# Altium PCB INPUT_Module.PcbDoc
Units mm, origin at the board's own origin, x right, y up, seen from the top; angles counter-clockwise.
Board outline 45 x 90 mm, 2 copper layers (Top Layer, Bottom Layer); 44 components, 42 nets, 156 pads, 28 vias.
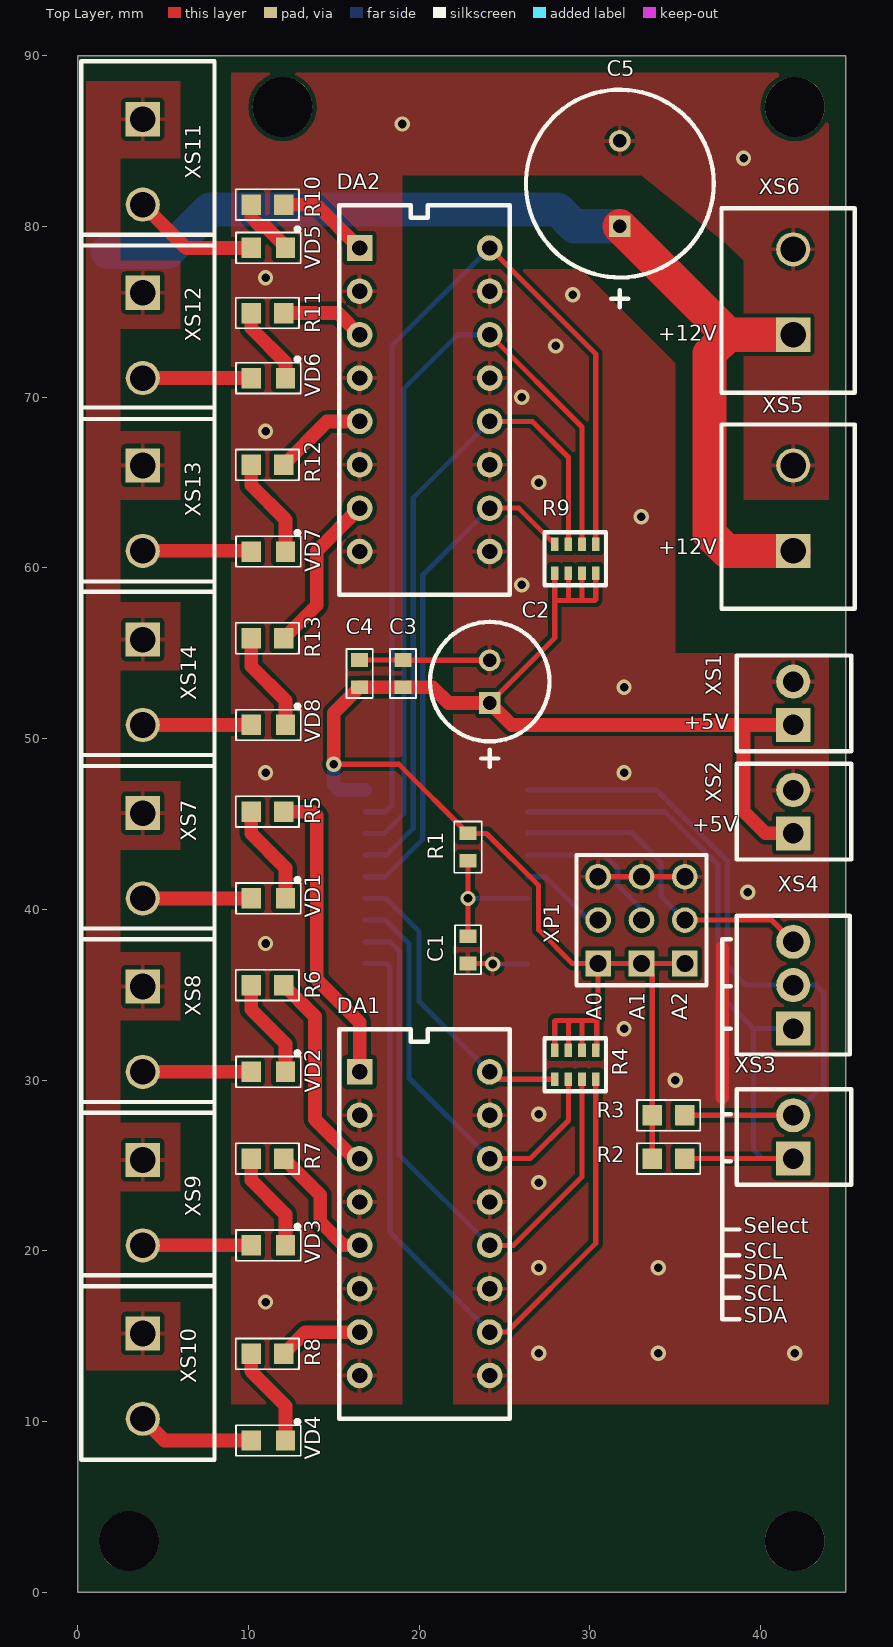
[diagram p0: Top Layer view]
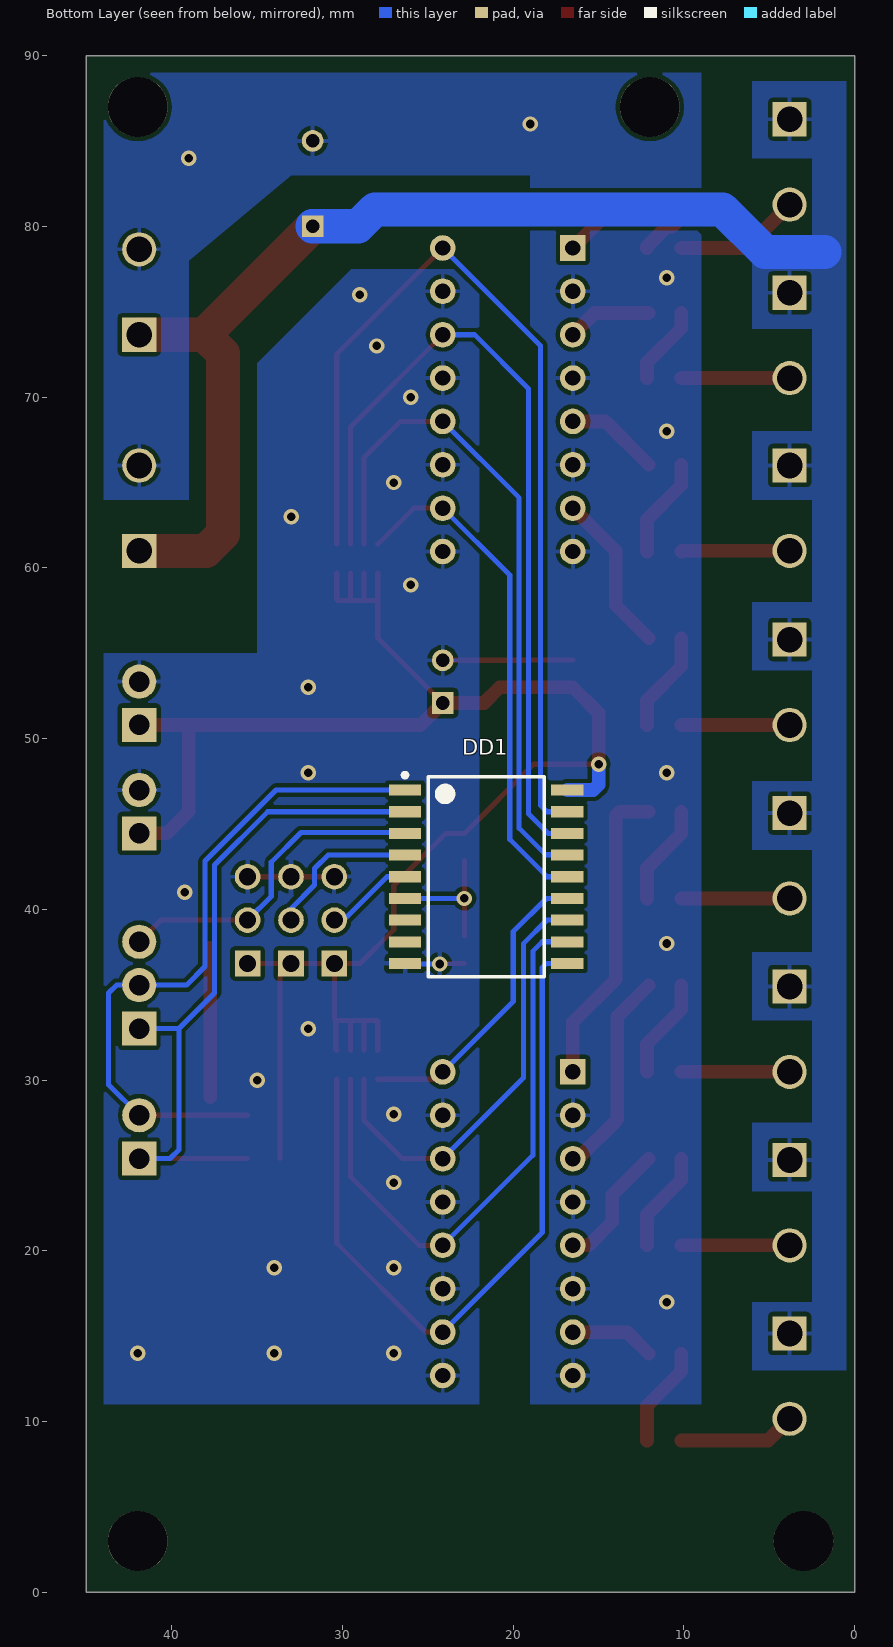
[diagram p1: Bottom Layer view, seen from below]

## Layer stack, top to bottom
Top Solder: solder mask 0.0102, Solder Resist, Dk 3.5
Top Layer: signal copper 0.0356
Dielectric 1: dielectric 0.32, FR-4, Dk 4.8
Bottom Layer: signal copper 0.0356
Bottom Solder: solder mask 0.0102, Solder Resist, Dk 3.5

## Board outline
0,0 45,0 45,90 0,90

## Design rules (kind name [scope] priority, off if disabled: settings)
Clearance [All] p1: gap=0.254 ignorepadtopadclearanceinfootprint=FALSE except(0: Arc-Hole Track-Hole SMDPad-Hole THPad-Hole Via-Hole Fill-Hole Poly-Hole Region-Hole Text-Hole)
PolygonConnect [All] p1: connectstyle=Relief reliefconductorwidth=0.254 reliefentries=4 polygonreliefangle="90 Angle" airgapwidth=0.254
RoutingVias [All] p1: holewidth=0.711 width=1.27 viastyle="Through Hole" minholewidth=0.711 minwidth=1.27 maxholewidth=0.711 maxwidth=1.27
SolderMaskExpansion [All] p1: expansion=0.102
Width [All] p1: maxlimit=2 minlimit=0.254 preferedwidth=0.5
30 further rules are at their usual default settings.

## Components (designator, comment, footprint, x,y, rotation, side; value= is the part's Value field where it differs from the comment)
C1 "0.1 мкФ" C0603 22.86,38.43 r270 top
C2 "0 мкФ" K50-35_6.3mm 24.13,53.34 r90 top
C3 "0.1 мкФ" C0603 19.05,53.01 r90 top
C4 "0.01 мкФ" C0603 16.51,53.01 r90 top
C5 "1000 мкФ 25В" K50-35_10mm 31.75,80.01 r90 top
DA1 "LTV847" DIP16 16.51,30.48 r270 top
DA2 "LTV847" DIP16 16.51,78.74 r270 top
DD1 "MCP23008" SOIC18 21.59,41.91 r180 bottom
R1 "10 кОм" R0603 22.86,44.45 r270 top
R2 "0 Ом" R0805 33.655,25.4 r0 top
R3 "0 Ом" R0805 33.655,27.94 r0 top
R4 "0 Ом" CAT16_F4 27.94,30.05 r0 top
R5 "1 кОм" R0805 10.16,45.72 r0 top
R6 "1 кОм" R0805 10.16,35.56 r0 top
R7 "1 кОм" R0805 10.16,25.4 r0 top
R8 "1 кОм" R0805 10.16,13.97 r0 top
R9 "0 Ом" CAT16_F4 30.34,61.39 r180 top
R10 "1 кОм" R0805 10.16,81.28 r0 top
R11 "1 кОм" R0805 10.16,74.93 r0 top
R12 "1 кОм" R0805 10.16,66.04 r0 top
R13 "1 кОм" R0805 10.16,55.88 r0 top
VD1 "Led_SMD" Led0805 12.17,40.64 r180 top
VD2 "Led_SMD" Led0805 12.17,30.48 r180 top
VD3 "Led_SMD" Led0805 12.17,20.32 r180 top
VD4 "Led_SMD" Led0805 12.17,8.89 r180 top
VD5 "Led_SMD" Led0805 12.17,78.74 r180 top
VD6 "Led_SMD" Led0805 12.17,71.12 r180 top
VD7 "Led_SMD" Led0805 12.17,60.96 r180 top
VD8 "Led_SMD" Led0805 12.17,50.8 r180 top
XP1 "PLS-3*3" PLS-3*3 35.56,36.83 r180 top
XS1 "Клеммник 308-021-14" 308-021-14_2.54 41.91,52.07 r90 top
XS2 "Клеммник 308-021-14" 308-021-14_2.54 41.91,45.72 r90 top
XS3 "Клеммник 308-021-14" 308-021-14_2.54 41.91,26.67 r90 top
XS4 "Клеммник 3_2.54" 3x2_54 41.91,35.56 r90 top
XS5 "Клеммник 302-021" 301-012 41.91,63.5 r90 top
XS6 "Клеммник 302-021" 301-012 41.91,76.16 r90 top
XS7 "Клеммник 302-021" 301-012 3.81,43.14 r270 top
XS8 "Клеммник 302-021" 301-012 3.81,32.98 r270 top
XS9 "Клеммник 302-021" 301-012 3.81,22.82 r270 top
XS10 "Клеммник 302-021" 301-012 3.81,12.66 r270 top
XS11 "Клеммник 302-021" 301-012 3.81,83.78 r270 top
XS12 "Клеммник 302-021" 301-012 3.81,73.62 r270 top
XS13 "Клеммник 302-021" 301-012 3.81,63.5 r270 top
XS14 "Клеммник 302-021" 301-012 3.81,53.3 r270 top

## Footprints (in the part's own frame and the unit in brackets; to place one, negate y for a bottom-side part, rotate by r counter-clockwise, add the part's x,y. Pads: shape width x height; smd on the part's side, far side on the other; paste and mask are expansions set on the pad)
3x2_54 [mm]
  rect 2x2 hole 1.2: 1(-2.54,0)
  round 2 hole 1.2: 2(0,0) 3(2.54,0)
  silkscreen extent -4.06,-3.3 4.06,3.3, body extent -4.04,-3.25 4.04,3.25, height 10
301-012 [mm]
  rect 2x2 hole 1.5: 1(-2.5,0)
  round 2 hole 1.5: 2(2.5,0)
  silkscreen extent -5.9,-3.6 4.9,4.2, body extent -5.85,-3.5 4.85,4.1, height 10.1
308-021-14_2.54 [mm]
  rect 2x2 hole 1.2: 1(-1.27,0)
  round 2 hole 1.2: 2(1.27,0)
  silkscreen extent -2.8,-3.4 2.8,3.3, body extent -2.77,-3.3 2.77,3.2, height 8.5
C0603 [mm]
  rect 0.8x1 smd: 1(0,0) 2(1.6,0)
  silkscreen extent -0.64,-0.76 2.24,0.76, body extent 0,-0.4 1.6,0.4, height 0.3
CAT16_F4 [mm]
  rect 0.45x0.8 smd: 1(0,0) 2(0,1.7) 3(0.8,0) 4(0.8,1.7) 5(1.6,0) 6(1.6,1.7) 7(2.4,0) 8(2.4,1.7)
  silkscreen extent -0.6,-0.7 3,2.4, body extent -0.4,0.2 2.8,1.8, height 0.5
DIP16 [mm]
  rect 1.5x1.5 hole 0.9: 1(0,0)
  round 1.5 hole 0.9: 2(2.54,0) 3(5.08,0) 4(7.62,0) 5(10.16,0) 6(12.7,0) 7(15.24,0) 8(17.78,0) 9(17.78,7.62) 10(15.24,7.62) 11(12.7,7.62) 12(10.16,7.62) 13(7.62,7.62) 14(5.08,7.62) 15(2.54,7.62) 16(0,7.62)
  silkscreen extent -2.5,-1.2 20.32,8.8, body extent -1.9,-0.25 19.68,7.62, height 4.19
K50-35_6.3mm [mm]
  rect 1.27x1.27 hole 0.8: 1(-1.25,0)
  round 1.27 hole 0.8: 2(1.25,0)
  silkscreen extent -5,-3.5 3.5,3.5, body extent -3.15,-3.15 3.15,3.15, height 12.8
K50-35_10mm [mm]
  rect 1.27x1.27 hole 0.8: 1(0,0)
  round 1.27 hole 0.8: 2(5,0)
  silkscreen extent -4.75,-5.5 8,5.5
Led0805 [mm]
  rect 1.14x1.2 smd: 1(0,0) 2(2.01,0)
  silkscreen extent -0.9,-1.2 2.9,0.9, body extent -0.01,-0.62 2.01,0.63, height 1.1
PLS-3*3 [mm]
  rect 1.5x1.5 hole 1: 1(0,0) 4(2.54,0) 7(5.08,0)
  round 1.5 hole 1: 2(0,-2.54) 3(0,-5.08) 5(2.54,-2.54) 6(2.54,-5.08) 8(5.08,-2.54) 9(5.08,-5.08)
  silkscreen extent -1.27,-6.35 6.35,1.27, body extent -1.27,-6.35 6.35,1.27, height 8.54
R0603 [mm]
  rect 0.8x1 smd: 1(0,0) 2(1.6,0)
  silkscreen extent -0.7,-0.8 2.3,0.8, body extent -0.06,-0.38 1.64,0.42, height 0.56
R0805 [mm]
  rect 1.14x1.2 smd: 1(0,0) 2(1.905,0)
  silkscreen extent -0.9,-0.9 2.8,0.9, body extent -0.21,-0.67 2.09,0.68, height 0.76
SOIC18 [mm]
  rect 1.9x0.65 smd: 1(-4.75,5.08) 2(-4.75,3.81) 3(-4.75,2.54) 4(-4.75,1.27) 5(-4.75,0) 6(-4.75,-1.27) 7(-4.75,-2.54) 8(-4.75,-3.81) 9(-4.75,-5.08) 10(4.75,-5.08) 11(4.75,-3.81) 12(4.75,-2.54) 13(4.75,-1.27) 14(4.75,0) 15(4.75,1.27) 16(4.75,2.54) 17(4.75,3.81) 18(4.75,5.08)
  silkscreen extent -4.88,-5.85 3.4,6.08, body extent -3.8,-5.85 3.8,5.85, height 2.64

## Part data
C1 C3: library part Cap_SMD
C2: library part K50-35_6.3mm
C4: library part C0603
C5: library part K50-35_10mm, chip-dip=9000565924
R1 R5 R6 R7 R8 R10 R11 R12 R13: library part ResSMD
R2 R3: library part R0805
R4 R9: library part KAT16-F4
XS1 XS2 XS3: "308-021-14_2.54"
XS5 XS6 XS7 XS8 XS9 XS10 XS11 XS12 XS13 XS14: "302-021-xx"

## Free pads (board coordinates)
  round 3.5 hole 3.5 unplated: 1(3,3) 1(12,87) 1(42,3) 1(42,87)

## Via types
v1: diameter 0.9, hole 0.5, Top Layer to Bottom Layer, 28 vias

## Nets (pads, with @x,y where several pads share a name; then routed paths per layer and width w, separated by ;. In a path a pad name is that pad's centre, name@x,y a point inside that pad or via, vN(x,y) a via of type N, cw(c..) or ccw(c..) an arc to the next point about the centre after c; other vN are vias at no path point)
+5v: C2.1 C3.1 C4.1 DD1.18 R1.1 R2.1 R3.1 R4.2 R4.4 R4.6 R4.8 R9.2 R9.4 R9.6 R9.8 XP1.1 XP1.4 XP1.7 XS1.1 XS2.1 | length 110.8
  Top Layer w0.3: v1(15,48.5) 18.81,48.5 R1.1 23.95,44.45 27,41.4 27,38.8 28.97,36.83 XP1.7 ; C2.1 27.94,55.9 R9.8 ; R4.2 27.94,33.46 27.98,33.5 28.9,33.5 ; 28.1,58.1 28.68,58.1 ; R4.4 28.74,33.34 28.9,33.5 ; R9.6 28.74,58.16 28.68,58.1 ; R4.6 29.54,33.46 29.5,33.5 ; R9.4 29.54,58.14 29.5,58.1 ; R4.8 30.4,31.81 30.4,33.5 ; R9.2 30.34,58.14 30.3,58.1 29.5,58.1 ; R2.1 R3.1 33.655,36.195 XP1.4 ; XP1.1 XP1.4 ; 28.68,58.1 29.5,58.1 ; 28.9,33.5 29.5,33.5 ; 29.5,33.5 30.4,33.5 ; 30.4,33.5 30.48,33.58 XP1.7 ; XP1.7 XP1.4
  Top Layer w0.8: v1(15,48.5) 15,51.5 C4.1 C3.1 20.79,53.01 21.71,52.09 C2.1 25.42,50.8 39,50.8 ; XS2.1 40.3,44.45 39,45.75 39,50.8 ; XS1.1 39,50.8
  Bottom Layer w0.8: v1(15,48.5) 15,47.3 15.31,46.99 DD1.18
+12v: C5.1 XS5.1 XS6.1 XS7.1 XS8.1 XS9.1 XS10.1 XS11.1 XS12.1 XS13.1 XS14.1 | length 61.7
  Top Layer w2: C5.1 38.1,73.66 ; XS5.1 38,61 37,62 37,72.56 38.1,73.66 ; XS6.1 38.1,73.66
  Bottom Layer w2: 1.76,78.51 5.26,78.51 7.75,81 28.1,81 29.09,80.01 C5.1
A0: DD1.5 XP1.8 | length 5.2
  Bottom Layer w0.3: DD1.5 27.39,41.91 29.93,39.37 XP1.8
A1: DD1.4 XP1.5 | length 9.2
  Bottom Layer w0.3: DD1.4 30.842,43.18 31.634,42.388 31.634,41.426 33.02,40.04 XP1.5
A2: DD1.3 XP1.2 XS4.3 | length 19.4
  Top Layer w0.3: XP1.2 40.64,39.37 XS4.3
  Bottom Layer w0.3: DD1.3 26.39,44.5 32.436,44.5 34.174,42.762 34.174,40.756 XP1.2
DGND: C1.2 C2.2 C3.2 C4.2 DA1.9 DA1.11 DA1.13 DA1.15 DA2.9 DA2.11 DA2.13 DA2.15 DD1.9 XP1.3 XP1.6 XP1.9 XS1.2 XS2.2 | length 25
  Top Layer w0.3: C4.2 C3.2 19.07,54.59 C2.2 ; C1.2 24.27,36.83 v1(24.3,36.8) ; XP1.9 XP1.6 XP1.3
  Top Layer w0.8: 37.75,28.994 37.75,37.75
  Bottom Layer w0.3: v1(24.3,36.8) 26.31,36.8 DD1.9
  other v1: 27,14 34,14 42,14 27,19 34,19 27,24 27,28 35,30 32,33 39.25,41 32,48 32,53 26,59 33,63 27,65 26,70 28,73 29,76
GND: C5.2 DA1.2 DA1.4 DA1.6 DA1.8 DA2.2 DA2.4 DA2.6 DA2.8 XS5.2 XS6.2
  other v1: 11,17 11,38 11,48 11,68 11,77 39,84 19,86
GP1: DA1.10 DD1.10 R4.7 | length 43.3
  Top Layer w0.3: DA1.10 25.14,15.24 30.34,20.44 R4.7
  Bottom Layer w0.3: DD1.10 18.07,36.83 18.3,36.6 18.3,21.07 DA1.10
GP2: DA1.12 DD1.11 R4.5 | length 34.4
  Top Layer w0.3: DA1.12 25.52,20.32 29.54,24.34 R4.5
  Bottom Layer w0.3: DD1.11 18.3,38.1 18.854,37.546 18.854,25.596 DA1.12
GP3: DA1.14 DD1.12 R4.3 | length 25.6
  Top Layer w0.3: DA1.14 26.5,25.4 28.74,27.64 R4.3
  Bottom Layer w0.3: DD1.12 18.03,39.37 19.408,37.992 19.408,30.122 DA1.14
GP4: DA1.16 DD1.13 R4.1 | length 17.9
  Top Layer w0.3: DA1.16 24.56,30.05 R4.1
  Bottom Layer w0.3: DD1.13 18.06,40.64 20,38.7 20,34.61 DA1.16
GP5: DA2.10 DD1.14 R9.7 | length 30
  Top Layer w0.3: DA2.10 25.83,63.5 R9.7
  Bottom Layer w0.3: DD1.14 18.01,41.91 20.208,44.108 20.208,59.578 DA2.10
GP6: DA2.12 DD1.15 R9.5 | length 39.7
  Top Layer w0.3: DA2.12 26.62,68.58 28.74,66.46 R9.5
  Bottom Layer w0.3: DD1.15 16.86,43.2 18.1,43.2 19.654,44.754 19.654,64.104 DA2.12
GP7: DA2.14 DD1.16 R9.3 | length 48.5
  Top Layer w0.3: DA2.14 29.54,68.25 R9.3
  Bottom Layer w0.3: DD1.16 17.95,44.45 19.1,45.6 19.1,70.5 22.26,73.66 DA2.14
GP8: DA2.16 DD1.17 R9.1 | length 56.7
  Top Layer w0.3: DA2.16 30.34,72.53 R9.1
  Bottom Layer w0.3: DD1.17 18.02,45.72 18.4,46.1 18.4,73.01 DA2.16
NetC1_1: C1.1 DD1.6 R1.2 | length 7.9
  Top Layer w0.3: C1.1 v1(22.86,40.64) R1.2
  Bottom Layer w0.3: v1(22.86,40.64) DD1.6
NetDA1_1: DA1.1 R5.2 | length 18.1
  Top Layer w0.8: R5.2 13.78,45.72 14,45.5 14,35.9 16.51,33.39 DA1.1
NetDA1_3: DA1.3 R6.2 | length 12.2
  Top Layer w0.8: R6.2 13.9,33.725 13.9,27.7 16.2,25.4 DA1.3
NetDA1_5: DA1.5 R7.2 | length 7.5
  Top Layer w0.8: R7.2 14.2,23.265 14.2,21.7 15.58,20.32 DA1.5
NetDA1_7: DA1.7 R8.2 | length 5
  Top Layer w0.8: R8.2 13.335,15.24 DA1.7
NetDA2_1: DA2.1 R10.2 | length 5.5
  Top Layer w0.8: R10.2 13.97,81.28 DA2.1
NetDA2_3: DA2.3 R11.2 | length 5
  Top Layer w0.8: R11.2 15.24,74.93 DA2.3
NetDA2_5: DA2.5 R12.2 | length 5.5
  Top Layer w0.8: R12.2 14.605,68.58 DA2.5
NetDA2_7: DA2.7 R13.2 | length 9.5
  Top Layer w0.8: R13.2 14,57.815 14,60.99 DA2.7
NetR5_1: R5.1 VD1.1 | length 5.9
  Top Layer w0.8: R5.1 10.16,44.44 12.17,42.43 VD1.1
NetR6_1: R6.1 VD2.1 | length 5.9
  Top Layer w0.8: R6.1 10.16,34.14 12.17,32.13 VD2.1
NetR7_1: R7.1 VD3.1 | length 5.9
  Top Layer w0.8: R7.1 10.16,24.14 12.17,22.13 VD3.1
NetR8_1: R8.1 VD4.1 | length 5.9
  Top Layer w0.8: R8.1 10.16,12.94 12.17,10.93 VD4.1
NetR10_1: R10.1 VD5.1 | length 3.5
  Top Layer w0.8: R10.1 10.16,80.54 10.706,79.994 11.001,79.994 12.17,78.825 VD5.1
NetR11_1: R11.1 VD6.1 | length 4.6
  Top Layer w0.8: R11.1 10.16,74.04 12.17,72.03 VD6.1
NetR12_1: R12.1 VD7.1 | length 5.9
  Top Layer w0.8: R12.1 10.16,64.84 12.17,62.83 VD7.1
NetR13_1: R13.1 VD8.1 | length 5.9
  Top Layer w0.8: R13.1 10.16,54.24 12.17,52.23 VD8.1
NetVD1_2: VD1.2 XS7.2 | length 6.3
  Top Layer w0.8: XS7.2 VD1.2
NetVD2_2: VD2.2 XS8.2 | length 6.3
  Top Layer w0.8: XS8.2 VD2.2
NetVD3_2: VD3.2 XS9.2 | length 6.3
  Top Layer w0.8: XS9.2 VD3.2
NetVD4_2: VD4.2 XS10.2 | length 6.9
  Top Layer w0.8: XS10.2 5.08,8.89 VD4.2
NetVD5_2: VD5.2 XS11.2 | length 7.4
  Top Layer w0.8: XS11.2 6.35,78.74 VD5.2
NetVD6_2: VD6.2 XS12.2 | length 6.3
  Top Layer w0.8: XS12.2 VD6.2
NetVD7_2: VD7.2 XS13.2 | length 6.4
  Top Layer w0.8: XS13.2 10.12,61 VD7.2
NetVD8_2: VD8.2 XS14.2 | length 6.3
  Top Layer w0.8: XS14.2 VD8.2
SCL: DD1.1 R3.2 XS3.2 XS4.2 | length 40.2
  Top Layer w0.3: R3.2 XS3.2
  Bottom Layer w0.3: DD1.1 33.893,46.99 38.054,42.829 38.054,36.646 39.14,35.56 XS4.2 43.24,35.56 43.7,35.1 43.7,29.73 XS3.2
SDA: DD1.2 R2.2 XS3.1 XS4.1 | length 41.2
  Top Layer w0.3: R2.2 XS3.1
  Bottom Layer w0.3: DD1.2 34.38,45.72 37.5,42.6 37.5,35.1 39.58,33.02 ; XS3.1 40.1,25.4 39.58,25.92 39.58,33.02 ; XS4.1 39.58,33.02
pads on no net: DD1.7 DD1.8

## Polygon pours and split planes (outlines as drawn)
+12v on Top Layer "Top Layer-No Net" (solid, remove dead copper, pour order 0): 6,13 0.5,13 0.5,88.5 6,88.5 6,84 2.5,84 2.5,78 6,78 6,74 2.5,74 2.5,68 6,68 6,64 2.5,64 2.5,58 6,58 6,54 2.5,54 2.5,47.5 6,47.5 6,43.5 2.5,43.5 2.5,37.5 6,37.5 6,33.5 2.5,33.5 2.5,27.5 6,27.5 6,23.5 2.5,23.5 2.5,17 6,17
GND on Top Layer "Top Layer-No Net" (solid, pour order 6): 19,11 9,11 9,89 41,89 44,86 44,64 39,64 39,78 38,79 33,83 19,83
DGND on Top Layer "Top Layer-No Net" (solid, pour order 8): 22,77.5 22,11 44,11 44,55 35,55 35,72 29.5,77.5
DGND on Bottom Layer "Top Layer-No Net" (solid, pour order 10): 44,11 22,11 22,77.5 29.5,77.5 35,72 35,55 44,55
+12v on Bottom Layer "Top Layer-No Net" (solid, pour order 14): 0.5,88.5 6,88.5 6,84 2.5,84 2.5,78 6,78 6,74 2.5,74 2.5,68 6,68 6,64 2.5,64 2.5,58 6,58 6,54 2.5,54 2.5,47.5 6,47.5 6,43.5 2.5,43.5 2.5,37.5 6,37.5 6,33.5 2.5,33.5 2.5,27.5 6,27.5 6,23.5 2.5,23.5 2.5,17 6,17 6,13 0.5,13
GND on Bottom Layer "Top Layer-No Net" (solid, pour order 4): 44,89 9,89 9,11 19,11 19,83 33,83 39,78 39,64 44,64

## Silkscreen, mask and mechanical layers (free items; w line width, h text height)
Top Overlay:
  lines w0.254: 37.75,17.25 38.75,17.25 ; 37.75,18.5 38.75,18.5 ; 37.75,19.75 38.75,19.75 ; 37.75,21.25 38.75,21.25 ; 37.75,25.25 38.25,25.25 ; 37.75,28 38.25,28 ; 37.75,33 38.25,33 ; 37.75,35.5 38.25,35.5 ; 38.25,38.25 37.75,38.25 37.75,16 38.75,16
  text "+12V" at 34,73 h1.52
  text "+12V" at 34,60.5 h1.52
  text "+5V" at 35.5,50.25 h1.52
  text "+5V" at 36,44.25 h1.52
  text "A0" at 31,33.5 h1.52 r90
  text "A1" at 33.5,33.5 h1.52 r90
  text "A2" at 36,33.5 h1.52 r90
  text "Select" at 39,20.75 h1.52
  text "SCL" at 39,19.25 h1.52
  text "SDA" at 39,18 h1.52
  text "SCL" at 39,16.75 h1.52
  text "SDA" at 39,15.5 h1.52
Board:
  the board outline again, w0.254